# EAGLE board PCU_R1 (EAGLE 7.7.0)
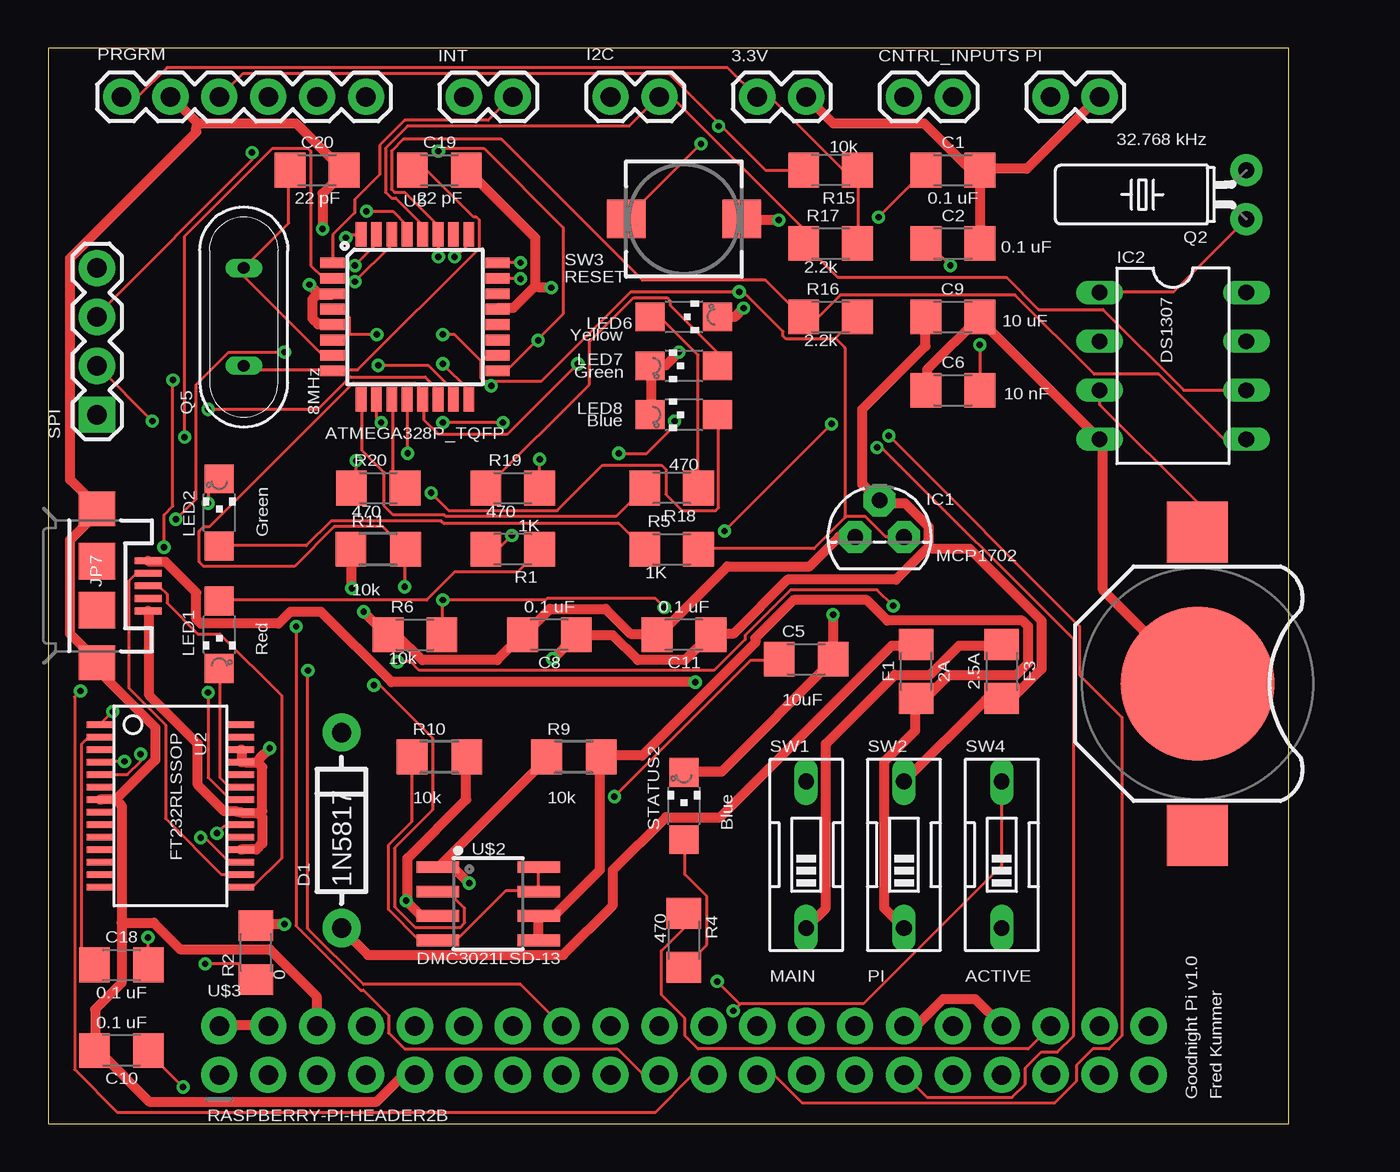
[diagram p0: board, top side]
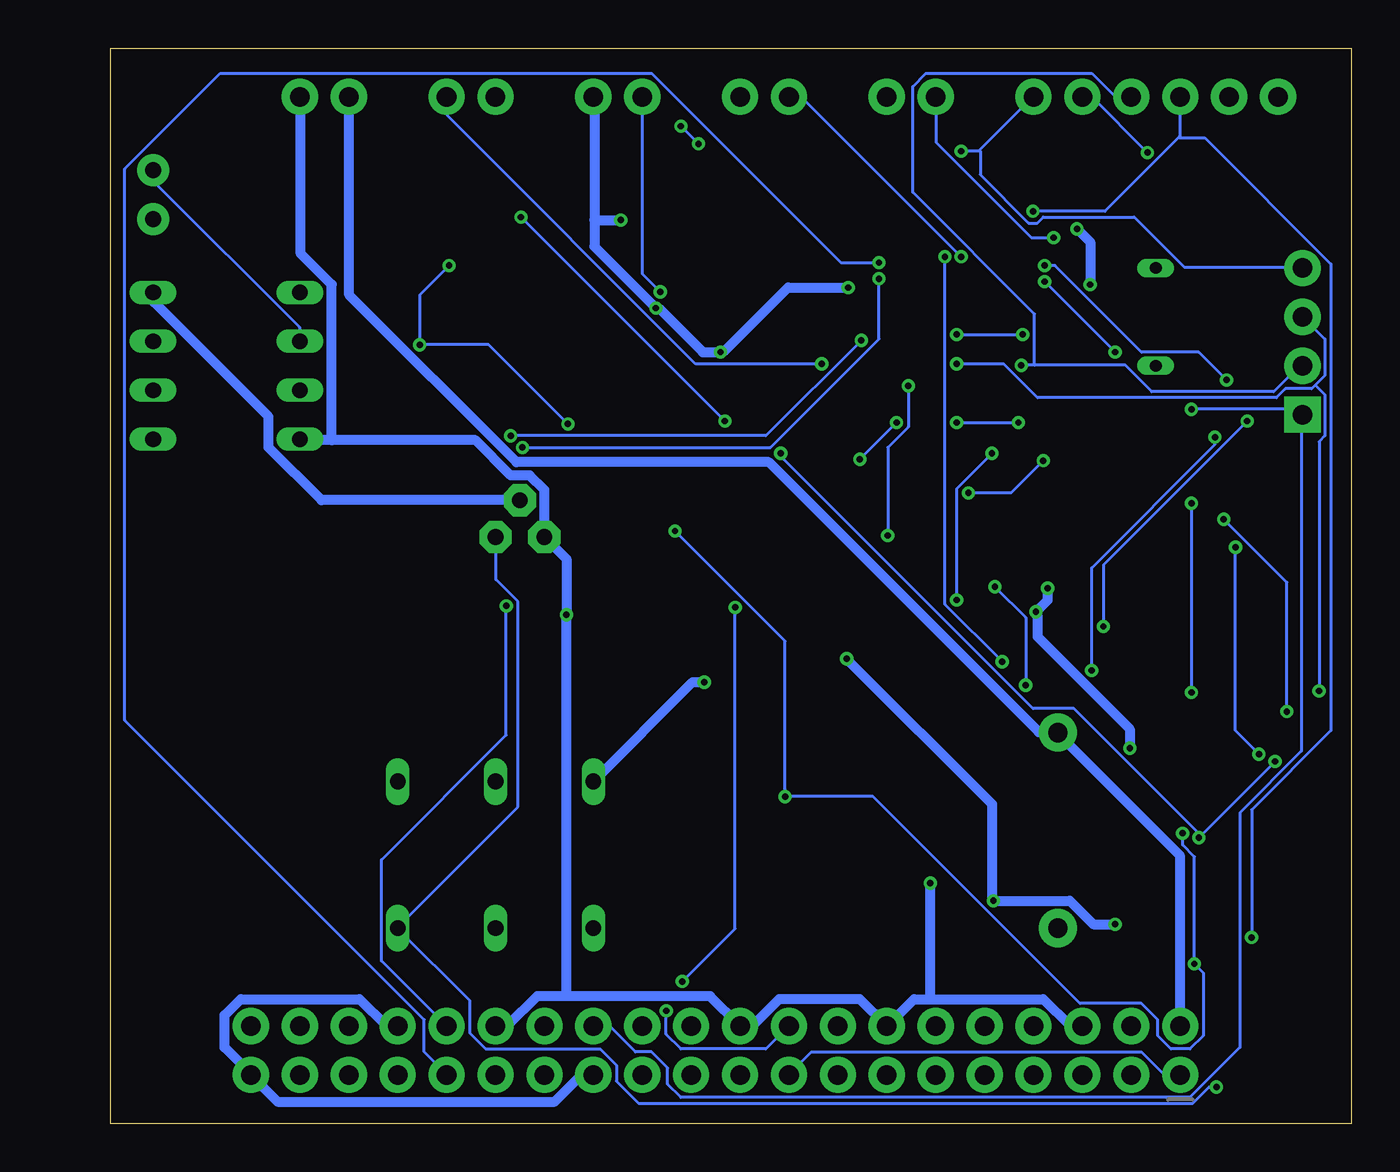
[diagram p1: board, bottom side, seen from below]

Size 64.44 x 55.87 mm. Coordinates in mm from the lower left corner, seen from the top.
Outline: 0,0 64.44,0 64.44,55.87 0,55.87 0,0
Copper layers (1*16): Top 0.0356mm / dielectric 1.5011mm / Bottom 0.0356mm
Design rules "LaenPCBOrder": minimum track width 6mil, minimum drill 13mil, track to track 6mil, track to pad 6mil, pad to pad 6mil, via to via 6mil, smd to smd 6mil, copper to edge 15mil, drill to drill 6mil, minimum pad ring 7mil, minimum via ring 7mil, stop-mask expansion 3mil, vias tented up to drill 0mil, thermal gap 10mil
Net classes: 1 actuator: width 0.813 mm, clearance 0.229 mm; 2 pi: width 0.508 mm

## Footprints (pad centres in the part's own frame; a part is rotated, then mirrored left to right if it is on the bottom)
1X02 = drill 1.016 pad 1.88: 1 0,0; 2 2.54,0
BATTCON_12MM = smd 8 x 8: GND 0,0 | smd 3.175 x 3.175: PWR@1 -7.874,0; PWR@2 7.874,0
1206 = smd 1.6 x 1.8: 1 -1.4,0; 2 1.4,0
C1206 = smd 1.6 x 1.8: 1 -1.4,0; 2 1.4,0
DIODE-1N4001 = drill 1 pad 1.981: A -5.08,0; C 5.08,0
TO92 = drill 0.813 pad 1.676 octagon: 1 -1.27,0; 2 0,1.905; 3 1.27,0
DIL08 = drill 0.813 long: 1 -3.81,-3.81; 2 -1.27,-3.81; 3 1.27,-3.81; 4 3.81,-3.81; 5 3.81,3.81; 6 1.27,3.81; 7 -1.27,3.81; 8 -3.81,3.81
1X04 = drill 1.016 pad 1.88 square: 1 0,0 | drill 1.016 pad 1.88: 2 2.54,0; 3 5.08,0; 4 7.62,0
1X06 = drill 1.016 pad 1.88: 1 0,0; 2 2.54,0; 3 5.08,0; 4 7.62,0; 5 10.16,0; 6 12.7,0
USB-MICROB = smd 0.35 x 1.4: D+ 0,2.65; D- -0.65,2.65; GND 1.3,2.65; ID 0.65,2.65; VBUS -1.3,2.65 | smd 1.8 x 1.9: MT1 -4,0; MT2 4,0 | smd 1.9 x 1.9: P$1 -1.27,0; P$2 1.27,0
CHIPLED_1206 = smd 1.5 x 1.5: A 0,-1.75; C 0,1.75
TC38H = drill 0.813 pad 1.676: 1 -1.27,0; 2 1.27,0
QS = drill 0.61 long: 1 -2.54,0; 2 2.54,0
R1206 = smd 1.6 x 1.803: 1 -1.422,0; 2 1.422,0
EDG-01 = drill 0.813 long: 1 0,-3.81; 2 0,3.81
PUSHBUTTON_SMD_SJ = smd 2 x 2: P$1 3,0; P$2 -3,0
SSOP28DB = smd 0.348 x 1.397: 1 -4.225,-3.656; 2 -3.575,-3.656; 3 -2.925,-3.656; 4 -2.275,-3.656; 5 -1.625,-3.656; 6 -0.975,-3.656; 7 -0.325,-3.656; 8 0.325,-3.656; 9 0.975,-3.656; 10 1.625,-3.656; 11 2.275,-3.656; 12 2.925,-3.656; 13 3.575,-3.656; 14 4.225,-3.656; 15 4.225,3.656; 16 3.575,3.656; 17 2.925,3.656; 18 2.275,3.656; 19 1.625,3.656; 20 0.975,3.656; 21 0.325,3.656; 22 -0.325,3.656; 23 -0.975,3.656; 24 -1.625,3.656; 25 -2.275,3.656; 26 -2.925,3.656; 27 -3.575,3.656; 28 -4.225,3.656
TQFP32-08 = smd 1.27 x 0.559: 1 -4.293,2.8; 2 -4.293,2; 3 -4.293,1.2; 4 -4.293,0.4; 5 -4.293,-0.4; 6 -4.293,-1.2; 7 -4.293,-2; 8 -4.293,-2.8; 17 4.293,-2.8; 18 4.293,-2; 19 4.293,-1.2; 20 4.293,-0.4; 21 4.293,0.4; 22 4.293,1.2; 23 4.293,2; 24 4.293,2.8 | smd 0.559 x 1.27: 9 -2.8,-4.293; 10 -2,-4.293; 11 -1.2,-4.293; 12 -0.4,-4.293; 13 0.4,-4.293; 14 1.2,-4.293; 15 2,-4.293; 16 2.8,-4.293; 25 2.8,4.293; 26 2,4.293; 27 1.2,4.293; 28 0.4,4.293; 29 -0.4,4.293; 30 -1.2,4.293; 31 -2,4.293; 32 -2.8,4.293
SOIC-8 = smd 0.61 x 2.21: 1 -1.905,-2.616; 2 -0.635,-2.616; 3 0.635,-2.616; 4 1.905,-2.616; 5 1.905,2.616; 6 0.635,2.616; 7 -0.635,2.616; 8 -1.905,2.616
2X20-NOSILK = drill 1.016 pad 1.88: 1 0,0; 2 0,2.54; 3 2.54,0; 4 2.54,2.54; 5 5.08,0; 6 5.08,2.54; 7 7.62,0; 8 7.62,2.54; 9 10.16,0; 10 10.16,2.54; 11 12.7,0; 12 12.7,2.54; 13 15.24,0; 14 15.24,2.54; 15 17.78,0; 16 17.78,2.54; 17 20.32,0; 18 20.32,2.54; 19 22.86,0; 20 22.86,2.54; 21 25.4,0; 22 25.4,2.54; 23 27.94,0; 24 27.94,2.54; 25 30.48,0; 26 30.48,2.54; 27 33.02,0; 28 33.02,2.54; 29 35.56,0; 30 35.56,2.54; 31 38.1,0; 32 38.1,2.54; 33 40.64,0; 34 40.64,2.54; 35 43.18,0; 36 43.18,2.54; 37 45.72,0; 38 45.72,2.54; 39 48.26,0; 40 48.26,2.54

## Placement (x,y rotation side)
3.3V  [1X02]  36.83,53.34 0 top
BAT1  [BATTCON_12MM]  59.69,22.86 270 top
C1  0.1 uF  [1206]  46.99,49.53 0 top
C2  0.1 uF  [1206]  46.99,45.72 0 top
C5  10uF  [C1206]  39.37,24.13 0 top
C6  10 nF  [1206]  46.99,38.1 0 top
C8  0.1 uF  [1206]  26.04,25.4 180 top
C9  10 uF  [C1206]  46.99,41.91 0 top
C10  0.1 uF  [1206]  3.81,3.81 180 top
C11  0.1 uF  [1206]  33.02,25.4 180 top
C18  0.1 uF  [1206]  3.81,8.26 0 top
C19  22 pF  [1206]  20.32,49.53 0 top
C20  22 pF  [1206]  13.97,49.53 0 top
CNTRL_INPUTS  [1X02]  44.45,53.34 0 top
D1  1N5817  [DIODE-1N4001]  15.24,15.24 90 top
F1  2A  [1206]  45.09,23.5 90 top
F3  2.5A  [1206]  49.53,23.5 270 top
IC1  MCP1702  [TO92]  43.18,30.48 0 top
IC2  DS1307  [DIL08]  58.42,39.37 270 top
INT  [1X02]  21.59,53.34 0 top
JP2  SPI  [1X04]  2.54,36.83 90 top
JP6  PRGRM  [1X06]  3.81,53.34 0 top
JP7  USB-MICROB  [USB-MICROB]  2.54,27.94 270 top
JP9  I2C  [1X02]  29.21,53.34 0 top
LED1  Red  [CHIPLED_1206]  8.89,25.4 180 top
LED2  Green  [CHIPLED_1206]  8.89,31.75 0 top
LED6  Green  [CHIPLED_1206]  33.02,41.91 270 top
LED7  Yellow  [CHIPLED_1206]  33.02,39.37 90 top
LED8  Blue  [CHIPLED_1206]  33.02,36.83 90 top
PI  [1X02]  52.07,53.34 0 top
Q2  32.768 kHz  [TC38H]  62.23,48.26 90 top
Q5  8MHz  [QS]  10.16,41.91 90 top
R1  1K  [1206]  24.13,29.84 180 top
R2  0  [1206]  10.79,8.89 90 top
R4  470  [1206]  33.02,9.53 270 top
R5  1K  [1206]  32.38,29.84 0 top
R6  10k  [1206]  19.05,25.4 0 top
R9  10k  [R1206]  27.3,19.05 0 top
R10  10k  [R1206]  20.32,19.05 0 top
R11  10k  [R1206]  17.14,29.84 0 top
R15  10k  [1206]  40.64,49.53 180 top
R16  2.2k  [1206]  40.64,41.91 0 top
R17  2.2k  [1206]  40.64,45.72 0 top
R18  470  [1206]  32.38,33.02 180 top
R19  470  [1206]  24.13,33.02 0 top
R20  470  [1206]  17.14,33.02 0 top
STATUS2  Blue  [CHIPLED_1206]  33.02,16.51 0 top
SW1  MAIN  [EDG-01]  39.37,13.97 0 top
SW2  PI  [EDG-01]  44.45,13.97 0 top
SW3  RESET  [PUSHBUTTON_SMD_SJ]  33.02,46.99 0 top
SW4  ACTIVE  [EDG-01]  49.53,13.97 0 top
U2  FT232RLSSOP  [SSOP28DB]  6.35,16.51 270 top
U5  ATMEGA328P_TQFP  [TQFP32-08]  19.05,41.91 0 top
U$2  DMC3021LSD-13  [SOIC-8]  22.86,11.43 270 top
U$3  RASPBERRY-PI-HEADER2B  [2X20-NOSILK]  8.89,2.54 0 top

## Library data of the parts
3.3V CNTRL_INPUTS INT JP2 JP9 PI = SparkFun-Connectors
BAT1 = SparkFun-Electromechanical; PROD_ID: BATT-08044
C1 C2 C6 C8 C10 C11 C18-C20 = SparkFun-Capacitors; PROD_ID: CAP-09822
C5 C9 IC1 IC2 LED1 LED2 LED6-LED8 R9-R11 STATUS2 SW3 = adafruit
D1 = SparkFun-DiscreteSemi
F1 F3 = SparkFun-Fuses; PROD_ID: RES-08585
JP6 = SparkFun-Connectors; PROD_ID: CONN-08437
JP7 = SparkFun-Connectors; PROD_ID: CONN-09505
Q2 = adafruit; OC_FARNELL: unknown; OC_NEWARK: unknown
Q5 SW1 SW2 SW4 = special
R1 R2 R5 = SparkFun-Resistors
R4 R6 R15-R20 = SparkFun-Passives
U2 = SparkFun
U5 = SparkFun-IC-Microcontroller; PROD_ID: IC-09069
U$2 U$3 = custom

## Nets
3.3V: 3.3V.1 C10.1 IC1.3 JP6.1 R1.2 R5.2 R15.1 R16.2 R17.2 SW4.1 U5.4 U5.6 U5.18
5V [pi]: C8.1 C9.1 C11.1 F3.2 IC1.2 IC2.8 R2.2 R10.2 SW2.2 U$2.3
5V_RAW [pi]: JP7.VBUS SW1.2
5V_SWITCH [pi]: F3.1 SW1.1
A0: U5.23 U$3.29
A1: U5.24 U$3.31
A2: U5.25 U$3.32
ACTIVE: R6.2 SW4.2 U5.12 U$3.18
ALIVE: U5.2 U$3.16
D+: JP7.D+ U2.15
D-: JP7.D- U2.16
DTR: C18.1 U2.2
FT232_VCC: C2.1 C5.1 C6.2 R2.1 U2.20
FUSE_DIODE_PI [pi]: D1.A F1.2
GND-ISO [pi]: 3.3V.2 BAT1.GND C1.2 C2.2 C5.2 C6.1 C8.2 C9.2 C10.2 C11.2 C19.2 C20.2 IC1.1 IC2.4 JP6.2 JP7.GND JP7.MT1 JP7.MT2 LED6.C LED7.C LED8.C PI.2 R6.1 R9.1 R11.1 STATUS2.C SW3.P$1 U2.7 U2.18 U2.21 U2.25 U2.26 U5.3 U5.5 U5.21 U$2.1 U$3.6 U$3.9 U$3.14 U$3.20 U$3.25 U$3.30 U$3.34 U$3.39
GP16: R4.1 U$3.36
INT0: INT.1 U5.32
INT1: INT.2 U5.1
MISO: JP2.3 JP6.5 U5.16 U$3.21
MOSI: JP2.2 JP6.4 U5.15 U$3.19
N$1: LED1.A R1.1
N$2: LED2.A R5.1
N$3: IC2.1 Q2.1
N$4: IC2.2 Q2.2
N$5: BAT1.PWR@1 IC2.3
N$10: R4.2 STATUS2.A
N$25: LED6.A R18.1
N$26: LED7.A R19.1
N$27: LED8.A R20.1
PD5: R18.2 U5.9
PD6: R19.2 U5.10
PD7: R20.2 U5.11
PI_3.3V: U$3.1 U$3.17
PI_5V [pi]: D1.C PI.1 U$3.2 U$3.4
PI_N_DRAIN: R10.1 U$2.4 U$2.7 U$2.8
PI_P_DRAIN [pi]: F1.1 R9.2 SW2.1 U$2.5 U$2.6
PI_PWR_CNTRL: CNTRL_INPUTS.2 R11.2 U5.13 U$2.2
RESET: C18.2 JP6.3 R15.2 SW3.P$2 U5.29
RXI: U2.5 U5.31
RXLED: LED2.C U2.22
SCL: IC2.6 JP9.2 R17.1 U5.28
SCLK: JP2.4 JP6.6 U5.17 U$3.23
SDA: IC2.5 JP9.1 R16.1 U5.27
SS: JP2.1 U5.14 U$3.26
TXLED: LED1.C U2.23
TXO: U2.1 U5.30
VCCIO: C1.1 U2.4 U2.17
XTAL1: C20.1 Q5.2 U5.7
XTAL2: C19.1 Q5.1 U5.8

## Tracks (layer width: path | path; a pad name or v marks a point on that pad's centre or on a via)
3.3V  (via drill 0.33)
  Top 0.152: R17.2 42.06,45.72 42.06,49.53 R15.1 41.3,49.53 37.49,53.34 3.3V.1 36.8,53.34 35.28,54.86 6.17,54.86 4.65,53.34 JP6.1 | 41.41,31.51 41.45,31.55 42.44,31.55 43.51,30.48 IC1.3 | 41.41,31.51 39.78,29.87 33.83,29.87 R5.2 | 15.58,41.03 15.62,41.07 15.62,41.91 15.24,42.29 14.78,42.29 U5.4 | 15.58,41.03 15.32,40.77 14.78,40.77 U5.6 | 22.52,39.59 22.48,39.55 22.48,38.71 22.63,38.56 23.01,38.56 | 22.52,39.59 22.78,39.85 23.32,39.85 U5.18 | 23.01,38.56 25.6,38.56 30.25,43.2 v35.89,43.2 36.12,43.2 38.18,41.15 38.18,40.92 38.33,40.77 40.84,40.77 40.88,40.8 | 40.88,40.8 41.99,41.91 R16.2 | v24.08,30.56 23.39,29.87 22.78,29.87 R1.2 | 23.01,38.56 v23.01,38.33 | v17.07,41 15.62,41 15.58,41.03 | v20.5,41 21.11,41 22.52,39.59 | 40.88,40.8 41.38,40.31 41.38,31.55 41.41,31.51 | v7.01,1.91 5.26,3.66 5.26,3.81 C10.1
  Bottom 0.152: v24.08,30.56 24.08,35.13 23.01,36.2 v23.01,38.33 | v20.5,41 v17.07,41 | v7.01,1.91 7.39,1.91 8.23,1.07 37.03,1.07 38.18,2.21 38.18,3.05 39.01,3.89 44.96,3.89 45.8,4.72 45.8,6.4 49.53,10.13 SW4.1 49.53,10.21 43.28,16.46 43.28,27.13 44.42,28.27 44.42,30.48 IC1.3 | v35.89,43.2 36.8,44.12 36.8,53.34 3.3V.1
5V  (via drill 0.33)
  Top 0.508: v12.27,10.36 10.82,10.36 R2.2 | U$2.3 20.19,10.82 19.36,10.82 v18.59,11.58 18.67,11.81 18.67,13.79 21.72,16.84 21.72,19.05 R10.2 | SW2.2 48.69,22.02 49.53,22.02 F3.2 49.76,22.17 50.14,22.17 51.59,23.62 51.59,26.14 47.85,29.87 45.95,29.87 45.72,29.95 | C9.1 45.57,41.91 45.57,40.39 42.29,37.11 42.29,33.22 43.13,32.38 IC1.2 43.36,32.23 44.5,32.23 45.72,31.01 45.72,29.95 | 45.72,29.95 44.04,28.27 38.41,28.27 35.59,25.45 34.67,25.45 C11.1 34.37,25.38 33.07,24.08 30.63,24.08 29.34,25.38 27.51,25.38 C8.1 27.28,25.22 v26.21,24.16
  Bottom 0.508: v12.27,10.36 13.41,10.36 14.63,11.58 v18.59,11.58 18.67,11.81 18.67,16.61 v26.21,24.16 | IC1.2 53.49,32.38 56.24,35.13 56.24,36.73 62.18,42.67 62.18,43.13 IC2.8
5V_RAW  (via drill 0.33)
  Top 0.508: v33.6,22.94 17.83,22.94 14.17,26.59 12.57,26.59 11.96,25.98 7.92,25.98 7.7,26.21 7.7,27.58 6.1,29.18 5.26,29.18 JP7.VBUS
  Bottom 0.508: v33.6,22.94 34.21,22.94 SW1.2
5V_SWITCH
  Top 0.508: F3.1 49.53,24.84 47.32,24.84 45.8,23.32 43.97,23.32 40.39,19.74 40.39,11.2 39.4,10.21 SW1.1
A0  (via drill 0.33)
  Top 0.152: v24.54,43.89 23.39,43.89 U5.23 | v43.05,35.13 43.28,35.13 53.26,25.15 53.26,4.57 52.43,3.73 51.59,3.73 50.75,2.9 50.75,2.06 50.06,1.37 45.64,1.37 44.5,2.52 U$3.29
  Bottom 0.152: v24.54,43.89 24.54,40.77 30.18,35.13 v43.05,35.13
A1  (via drill 0.33)
  Top 0.152: v24.54,44.73 23.39,44.73 U5.24
  Bottom 0.152: v24.54,44.73 26.52,44.73 36.35,54.56 58.75,54.56 63.7,49.61 63.7,20.95 48.16,5.41 48.16,3.73 47.02,2.59 U$3.31
A2  (via drill 0.33)
  Top 0.152: v21.11,45.03 21.18,45.03 21.79,45.64 21.79,46.18 U5.25 | v18.14,24 18.82,24 19.28,23.55 34.59,23.55 36.2,25.15 36.2,25.38 38.56,27.74 43.05,27.74 v43.89,26.9
  Bottom 0.152: v21.11,45.03 21.11,26.98 v18.14,24 | v43.89,26.9 43.89,20.19 50.37,13.72 50.37,8.46 U$3.32
ACTIVE  (via drill 0.33)
  Top 0.152: v18.67,34.82 18.67,37.57 U5.12 | R6.2 20.5,25.45 v20.5,27.2 25.83,27.2 25.91,27.28 31.55,27.28 v32,26.82 | SW4.2 49.53,13.41 42.37,6.25 35.97,6.25 35.93,6.21 | v35.59,5.87 35.93,6.21 | 35.93,6.21 v34.75,7.39
  Bottom 0.152: v18.67,34.82 20.5,32.99 v20.5,27.2 | v35.59,5.87 35.59,4.65 34.82,3.89 30.4,3.89 U$3.18 | v32,26.82 32,10.13 v34.75,7.39
ALIVE  (via drill 0.33)
  Top 0.152: v7.09,35.66 7.09,46.1 11.66,50.67 13.49,50.67 13.64,50.52 13.64,44.58 14.25,43.97 14.71,43.97 U5.2 | v13.49,23.55 13.49,10.13 16.38,7.24 24.54,7.24 26.67,5.11 U$3.16
  Bottom 0.152: v7.09,35.66 7.09,35.28 13.49,28.88 v13.49,23.55
D+
  Top 0.152: U2.15 10.06,12.34 10.67,12.34 12.12,13.79 12.12,22.25 8.91,25.45 7.77,25.45 6.17,27.05 6.17,27.51 5.79,27.89 5.26,27.89 JP7.D+
D-
  Top 0.152: U2.16 9.98,12.95 8.99,12.95 6.1,15.85 6.1,20.73 4.19,22.63 4.19,28.19 4.57,28.57 5.18,28.57 JP7.D-
DTR
  Top 0.152: U2.2 2.67,20.04 2.06,20.04 1.75,19.74 1.75,8.91 2.36,8.31 C18.1
FT232_VCC  (via drill 0.33)
  Top 0.152: v48.39,40.46 C6.2 | v46.86,44.58 45.72,45.72 C2.1 | v8.76,15.09 9.14,15.47 9.98,15.47 U2.20 | v8.15,8.31 9.98,8.31 10.74,7.54 R2.1 | v29.41,16.99 36.5,24.08 37.95,24.08 C5.1 | v35.13,30.79 v40.69,36.35
  Bottom 0.152: v46.86,44.58 48.39,43.05 v48.39,40.46 44.81,40.46 v40.69,36.35 | v8.76,15.09 8.76,14.48 8.15,13.87 v8.15,8.31 7.7,7.85 7.7,4.57 8.38,3.89 9.37,3.89 10.06,4.57 10.06,5.41 10.9,6.25 14.1,6.25 24.84,16.99 v29.41,16.99 29.41,25.07 v35.13,30.79
FUSE_DIODE_PI
  Top 0.508: F1.2 45.03,24.84 43.81,24.84 34.9,15.93 32.08,15.93 29.34,13.18 29.34,11.35 26.75,8.76 16.61,8.76 15.24,10.13 D1.A
GND-ISO  (via drill 0.33)
  Top 0.508: C2.2 C1.2 | C1.2 48.62,49.61 50.83,49.61 54.56,53.34 PI.2 | 25.3,43.51 24.16,42.37 23.39,42.37 U5.21 | 25.3,43.51 25.3,46.02 21.79,49.53 C19.2 | LED8.C 31.32,36.88 31.32,39.32 LED7.C 31.55,39.4 32.08,39.4 v32.77,40.08 | LED6.C 35.66,41.91 v36.12,42.37 | v37.95,46.94 36.04,46.94 SW3.P$1 | v26.14,43.43 25.53,43.43 25.3,43.51 | C1.2 48.16,49.61 47.85,49.61 45.49,51.97 40.77,51.97 39.4,53.34 3.3V.2 | C6.1 45.64,38.1 45.64,39.17 C9.2 48.46,41.68 54.56,35.59 IC2.4 54.79,35.36 54.79,27.74 59.66,22.86 BAT1.GND | U2.26 10.06,19.43 10.06,18.82 U2.25 10.29,18.75 10.9,18.75 | 10.97,16.08 10.9,16.15 10.06,16.15 U2.21 9.75,16.23 9.14,16.23 7.77,17.6 7.77,19.74 5.26,22.25 5.26,26.59 JP7.GND | 10.97,16.08 11.12,15.93 11.12,14.55 10.82,14.25 10.06,14.25 U2.18 | 10.9,18.75 11.12,18.52 11.12,16.23 10.97,16.08 | STATUS2.C 33.07,18.29 34.98,18.29 40.77,24.08 C5.2 40.77,24.38 v40.77,26.44 | v15.77,27.81 15.77,29.79 R11.1 | v16.38,26.59 17.45,25.53 R6.1 17.68,25.38 18.14,25.38 19.43,24.08 23.32,24.08 24.61,25.38 C8.2 24.84,25.53 26.06,26.75 28.96,26.75 30.25,25.45 31.55,25.45 C11.2 31.85,25.53 35.28,28.96 39.55,28.96 41.07,30.48 IC1.1 | v11.51,19.51 10.97,18.97 10.9,18.75 | U$3.30 44.5,5.11 45.11,5.11 46.48,6.48 48.16,6.48 49.53,5.11 U$3.34 | R9.1 25.83,19.05 25.83,18.9 20.27,13.34 U$2.1 20.8,13.56 v21.87,12.5 | 13.95,43.05 13.72,42.82 13.72,41.83 14.02,41.53 14.71,41.53 U5.5 | 13.95,43.05 14.71,43.05 U5.3 | 7.77,51.97 12.88,51.97 15.32,49.53 C20.2 15.24,49.3 14.25,48.31 v14.25,46.48 | 7.77,51.97 6.4,53.34 JP6.2 | v13.56,43.59 13.87,43.28 13.95,43.05 | 3.5,16.84 2.74,16.84 U2.7
  Top 0.508: 3.5,16.84 5.56,18.9 5.56,20.57 2.59,23.55 2.59,23.93 JP7.MT2 2.44,24.16 1.14,25.45 1.14,30.33 2.52,31.7 2.52,31.93 JP7.MT1 2.44,32.16 1.14,33.45 1.14,44.96 7.7,51.51 7.7,51.74 7.77,51.97 | 3.81,10.44 3.81,16.54 3.5,16.84 | 3.81,10.44 3.81,7.32 2.44,5.94 2.44,3.81 C10.2 2.67,3.73 5.26,1.14 17.07,1.14 18.44,2.52 19.05,2.52 U$3.9 | 3.81,10.44 5.49,10.44 6.86,9.07 11.51,9.07 13.95,6.63 13.95,5.11 U$3.6
  Bottom 0.508: 39.32,46.94 39.32,53.34 3.3V.2 | 39.32,46.94 39.32,45.57 v36.12,42.37 35.89,42.29 33.68,40.08 v32.77,40.08 32.54,40.16 29.26,43.43 v26.14,43.43 | 39.32,46.94 v37.95,46.94 | v15.77,27.81 15.77,27.2 v16.38,26.59 16.31,26.36 16.31,25.3 11.51,20.5 v11.51,19.51 | 52.96,35.51 45.49,35.51 43.66,33.68 42.67,33.68 41.91,32.92 IC1.1 40.77,29.34 v40.77,26.44 40.77,6.63 | 52.96,35.51 54.56,35.51 IC2.4 | 52.96,35.51 52.96,43.59 54.56,45.19 54.56,53.34 PI.2 | U$3.25 39.4,2.52 40.01,2.52 41.38,1.14 55.78,1.14 57.15,2.52 U$3.39 57.3,2.74 58.52,3.96 58.52,5.64 57.68,6.48 51.51,6.48 50.14,5.11 49.53,5.11 U$3.34 | 21.87,6.48 22.71,6.48 24.08,5.11 U$3.14 25.53,6.48 29.72,6.48 31.09,5.11 31.7,5.11 U$3.20 33.3,6.63 40.77,6.63 | 21.87,6.48 16,6.48 14.63,5.11 14.02,5.11 U$3.6 | 21.87,6.48 v21.87,12.5 | 40.77,6.63 42.29,6.63 43.81,5.11 44.42,5.11 U$3.30 | v13.56,43.59 13.56,45.8 v14.25,46.48
GP16
  Top 0.152: R4.1 32.99,10.9 32.99,10.13 31.85,8.99 31.85,6.71 33.07,5.49 33.07,4.57 33.76,3.89 50.9,3.89 52.05,5.03 U$3.36
INT0  (via drill 0.33)
  Top 0.152: v15.47,46.02 15.62,46.18 16.23,46.18 U5.32
  Bottom 0.152: v15.47,46.02 16.61,46.02 21.57,50.98 21.57,53.34 INT.1
INT1
  Top 0.152: U5.1 14.78,44.73 14.78,46.18 15.93,47.32 15.93,48.01 17.22,49.3 17.22,50.83 18.52,52.12 22.86,52.12 24.08,53.34 INT.2
MISO  (via drill 0.33)
  Top 0.152: v20.5,39.47 21.79,38.18 21.79,37.64 U5.16 | v1.68,22.48 1.37,22.17 1.37,2.82 3.58,0.61 31.55,0.61 33.45,2.52 34.29,2.52 U$3.21 | v10.59,50.44 10.59,50.06 2.59,42.06 2.59,41.91 JP2.3
  Bottom 0.152: v20.5,39.47 18.06,39.47 16.31,37.72 3.89,37.72 3.43,38.18 2.06,38.18 1.87,38.37 | 1.87,38.37 1.37,38.86 1.37,40.77 2.52,41.91 JP2.3 | v1.68,22.48 1.68,35.43 1.37,35.74 1.37,37.87 1.87,38.37 | JP6.5 13.49,53.34 v10.59,50.44
MOSI  (via drill 0.33)
  Top 0.152: v17.14,39.4 19.74,39.4 21.03,38.1 21.03,37.64 U5.15 | v12.88,25.83 12.88,10.29 16.23,6.93 16.38,6.93 17.68,5.64 17.68,4.72 18.52,3.89 29.57,3.89 30.86,2.59 31.7,2.59 U$3.19 | JP2.2 v5.41,36.5
  Bottom 0.152: 16.46,39.4 11.73,39.4 10.36,38.02 4.04,38.02 2.74,39.32 2.59,39.32 JP2.2 | 16.46,39.4 v17.14,39.4 | v12.88,25.83 12.88,29.03 v5.41,36.5 | JP6.4 12.27,53.34 13.49,54.56 22.1,54.56 22.78,53.87 22.78,48.39 16.46,42.06 16.46,39.4
N$1
  Top 0.152: LED1.A 8.91,27.2 19.66,27.2 21.11,28.65 24.38,28.65 25.53,29.79 R1.1
N$2
  Top 0.152: LED2.A 8.91,30.02 13.41,30.02 14.71,31.32 20.42,31.32 20.57,31.17 29.64,31.17 30.94,29.87 R5.1
N$3
  Top 0.152: Q2.1 58.45,43.2 54.63,43.2 IC2.1
N$4
  Bottom 0.152: IC2.2 54.63,40.69 54.63,41.38 62.18,48.92 62.18,49.53 Q2.2
N$5
  Top 0.152: IC2.3 54.63,38.1 54.63,37.34 59.66,32.31 59.66,30.79 BAT1.PWR@1
N$10
  Top 0.152: STATUS2.A 33.07,14.71 33.07,12.95 34.21,11.81 34.21,9.3 33.07,8.15 R4.2
N$25
  Top 0.152: LED6.A 31.77,41.91 33.76,39.93 33.76,33.07 R18.1
N$26
  Top 0.152: LED7.A 34.75,39.4 34.75,40.08 32.31,42.52 32.31,42.75 32.16,42.9 30.4,42.9 28.12,40.62 28.12,38.41 22.78,33.07 R19.1
N$27  (via drill 0.33)
  Top 0.152: v19.89,32.77 20.8,31.85 26.44,31.85 28.8,34.21 31.85,34.21 32.08,33.98 32.08,32.69 32.92,31.85 34.67,31.85 34.82,32 34.82,36.8 LED8.A | v16,34.44 16,33.3 15.77,33.07 R20.1
  Bottom 0.152: v19.89,32.77 17.68,32.77 v16,34.44
PD5
  Top 0.152: U5.9 16.31,37.57 16.31,34.98 17.45,33.83 17.45,32.08 17.91,31.62 20.57,31.62 20.65,31.55 29.49,31.55 30.94,32.99 R18.2
PD6  (via drill 0.33)
  Top 0.152: v17.3,36.42 17.07,36.65 17.07,37.57 U5.10 | v23.62,36.42 v20.5,36.42 | v25.53,34.52 25.53,33.07 R19.2
  Bottom 0.152: v20.5,36.42 v17.3,36.42 | v25.53,34.52 v23.62,36.42
PD7
  Top 0.152: U5.11 17.91,37.57 17.91,33.68 18.52,33.07 R20.2
PI_3.3V
  Bottom 0.152: U$3.1 8.91,2.59 9.75,2.59 10.9,3.73 28.04,3.73 29.18,2.59 U$3.17
PI_5V
  Top 0.508: U$3.2 8.91,5.11 11.43,5.11 U$3.4
  Bottom 0.508: PI.1 52.05,53.34 52.05,43.05 43.36,34.37 30.25,34.37 16.23,20.34 15.24,20.34 D1.C 15.09,20.12 8.91,13.95 8.91,5.11 U$3.2
PI_N_DRAIN
  Top 0.152: U$2.8 25.45,13.34 25.45,12.12 U$2.7 25.38,12.12 23.77,12.12 21.18,9.53 U$2.4 19.28,9.53 17.68,11.12 17.68,14.48 18.9,15.7 R10.1 | R10.1
PI_P_DRAIN
  Top 0.508: U$2.5 25.45,9.53 25.45,10.59 U$2.6 25.53,10.82 26.29,10.82 28.65,13.18 28.65,19.05 R9.2 28.96,19.13 30.86,19.13 36.73,24.99 36.73,25.22 38.71,27.2 42.52,27.2 43.59,26.14 50.6,26.14 50.9,25.83 50.9,23.93 50.29,23.32 46.79,23.32 45.57,22.1 45.34,22.1 F1.1 45.03,22.02 45.03,20.42 43.43,18.82 43.43,11.2 44.42,10.21 SW2.1
PI_PWR_CNTRL  (via drill 0.33)
  Top 0.152: v16.92,22.78 17.22,22.78 19.96,20.04 19.96,16.31 17.98,14.33 17.98,11.28 19.05,10.21 21.41,10.21 21.64,10.44 21.64,11.2 20.8,12.04 20.27,12.04 U$2.2 | v18.52,27.89 18.52,29.79 R11.2 18.52,29.87 17.37,31.01 14.86,31.01 12.8,28.96 8.08,28.96 7.85,29.18 7.85,30.79 8.08,31.01 8.38,31.01 15.85,38.48 19.05,38.48 19.43,38.1 19.43,37.64 U5.13 19.51,37.57 19.51,36.58 20.27,35.81 23.85,35.81 v27.51,39.47
  Bottom 0.152: v16.92,22.78 16.92,26.29 v18.52,27.89 | v27.51,39.47 34.06,39.47 46.94,52.35 46.94,53.34 CNTRL_INPUTS.2
RESET  (via drill 0.33)
  Top 0.152: v16.54,47.4 17.91,47.4 18.59,46.71 18.59,46.25 U5.29 | v5.18,9.68 5.18,8.31 C18.2 | R15.2 37.26,49.53 34.86,51.93 | 34.86,51.93 32.23,54.56 10.13,54.56 8.91,53.34 JP6.3 | v33.91,50.9 30.02,47.02 SW3.P$2 | v34.82,51.82 34.82,51.89 34.86,51.93
  Bottom 0.152: v16.54,47.4 12.8,47.4 8.95,51.24 | 8.95,51.24 8.91,51.28 8.91,53.34 JP6.3 | v5.18,9.68 5.18,16.31 1.07,20.42 1.07,44.65 7.62,51.21 8.91,51.21 8.95,51.24 | v34.82,51.82 v33.91,50.9
RXI  (via drill 0.33)
  Top 0.152: v15.93,44.58 16.99,45.64 16.99,46.18 U5.31 | v6.48,38.63 6.48,32.08 6.02,31.62 v6.02,29.95 | v4.8,19.2 4.8,18.82 4.12,18.14 2.74,18.14 U2.5
  Bottom 0.152: v15.93,44.58 15.39,44.58 10.9,40.08 7.92,40.08 v6.48,38.63 | v6.02,29.95 6.02,20.42 v4.8,19.2
RXLED  (via drill 0.33)
  Top 0.152: v8.31,22.4 8.31,17.98 9.45,16.84 9.98,16.84 U2.22 | v8.31,32.23 8.31,32.92 8.84,33.45 LED2.C
  Bottom 0.152: v8.31,32.23 v8.31,22.4
SCL
  Top 0.152: U5.28 19.43,46.25 19.43,46.71 18.06,48.08 17.83,48.08 17.53,48.39 17.53,50.67 18.67,51.82 30.18,51.82 31.7,53.34 JP9.2 32.38,53.34 39.17,46.56 39.17,45.72 R17.1 41,43.97 49.76,43.97 51.44,42.29 54.79,42.29 58.98,38.1 IC2.6
SCLK  (via drill 0.33)
  Top 0.152: 25.41,40.73 26.75,42.06 26.75,46.56 22.63,50.67 20.42,50.67 v20.27,50.52 | 25.41,40.73 23.85,39.17 23.39,39.17 U5.17 | v43.66,35.74 53.57,25.83 53.57,23.32 55.78,21.11 55.78,4.57 55.09,3.89 54.25,3.89 53.42,3.05 53.42,2.21 52.27,1.07 39.17,1.07 37.72,2.52 36.88,2.52 U$3.23 | v25.45,40.69 25.41,40.73
  Bottom 0.152: v20.27,50.52 19.36,50.52 19.32,50.56 | 19.32,50.56 16.54,53.34 JP6.6 | v43.66,35.74 30.4,35.74 v25.45,40.69 | JP2.4 2.59,44.5 8.69,44.5 11.28,47.09 16,47.09 16.31,46.79 16.76,46.79 19.28,49.3 19.28,50.52 19.32,50.56
SDA  (via drill 0.33)
  Top 0.152: v20.27,45.03 20.27,46.18 U5.27 20.19,46.25 20.19,46.71 18.52,48.39 17.98,48.39 17.83,48.54 17.83,50.52 18.44,51.13 23.55,51.13 30.86,43.81 37.26,43.81 39.17,41.91 R16.1 40.01,41.91 41.15,43.05 50.22,43.05 54.33,38.94 57.68,38.94 61.04,35.59 62.18,35.59 IC2.5
  Bottom 0.152: v20.27,45.03 28.57,53.34 JP9.1
SS  (via drill 0.33)
  Top 0.152: v8.31,37.11 14.02,37.11 15.7,38.79 19.58,38.79 20.19,38.18 20.19,37.64 U5.14
  Bottom 0.152: v8.31,37.11 2.82,37.11 JP2.1 2.59,36.8 2.59,19.36 5.79,16.15 5.79,3.96 8.38,1.37 34.82,1.37 35.51,2.06 35.51,2.9 36.35,3.73 37.19,3.73 38.48,5.03 39.32,5.03 U$3.26
TXLED
  Top 0.152: U2.23 9.98,17.53 9.37,17.53 8.91,17.98 8.91,23.62 LED1.C
TXO  (via drill 0.33)
  Top 0.152: v15.93,43.74 17.83,45.64 17.83,46.18 U5.30 | v12.27,40.08 9.37,40.08 7.7,38.41 7.7,32.46 v6.63,31.39 | v3.35,21.41 2.74,20.8 U2.1
  Bottom 0.152: v12.27,40.08 v15.93,43.74 | v6.63,31.39 3.35,28.12 v3.35,21.41
VCCIO  (via drill 0.33)
  Top 0.152: v3.96,18.82 2.74,18.82 U2.4 | v7.92,14.86 8.15,14.86 9.37,13.64 9.98,13.64 U2.17 | v43.13,47.09 45.57,49.53 C1.1 | v32.54,36.5 32.54,36.27 31.09,34.82 v29.64,34.82
  Bottom 0.152: v3.96,18.82 v7.92,14.86 7.85,15.01 14.4,21.57 16.54,21.57 29.64,34.67 v29.64,34.82 | v32.54,36.5 v43.13,47.09
XTAL1
  Top 0.152: U5.7 14.71,39.93 14.25,39.93 10.21,43.97 10.21,44.42 Q5.2 12.5,46.79 12.5,49.53 C20.1
XTAL2
  Top 0.152: Q5.1 10.36,39.17 14.71,39.17 U5.8 14.78,39.17 16.08,39.17 22.4,45.49 22.4,46.94 22.25,47.09 22.1,47.09 19.66,49.53 C19.1

## Text on the board
tNames: Goodnight Pi v1.0 | Fred Kummer